# EAGLE board BLDC_schematic_v14 (EAGLE 9.6.2)
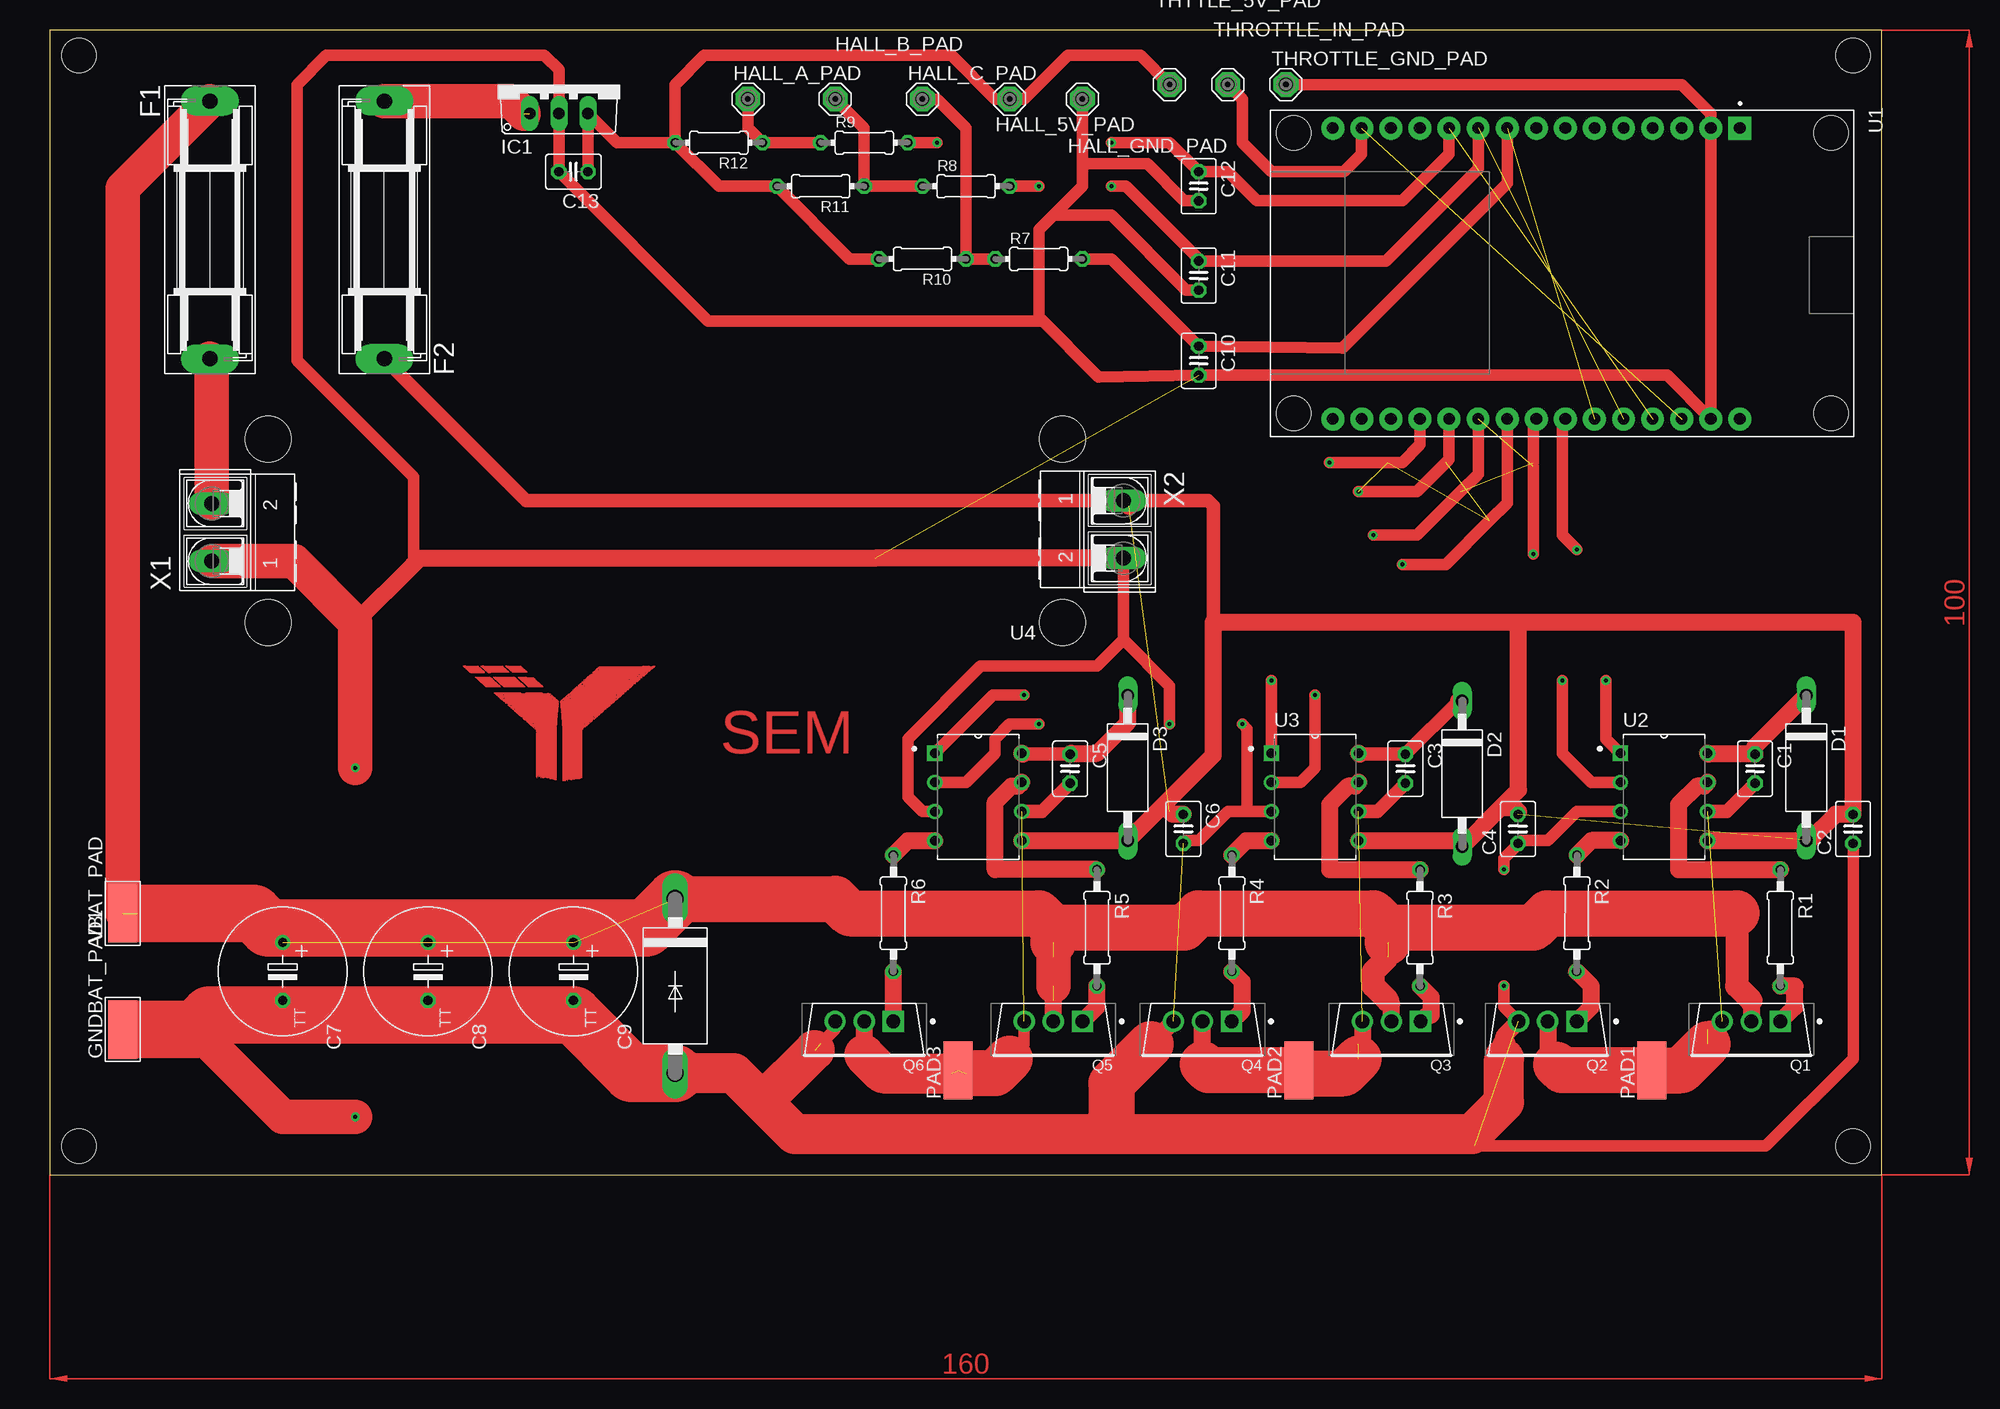
[diagram p0: board, top side]
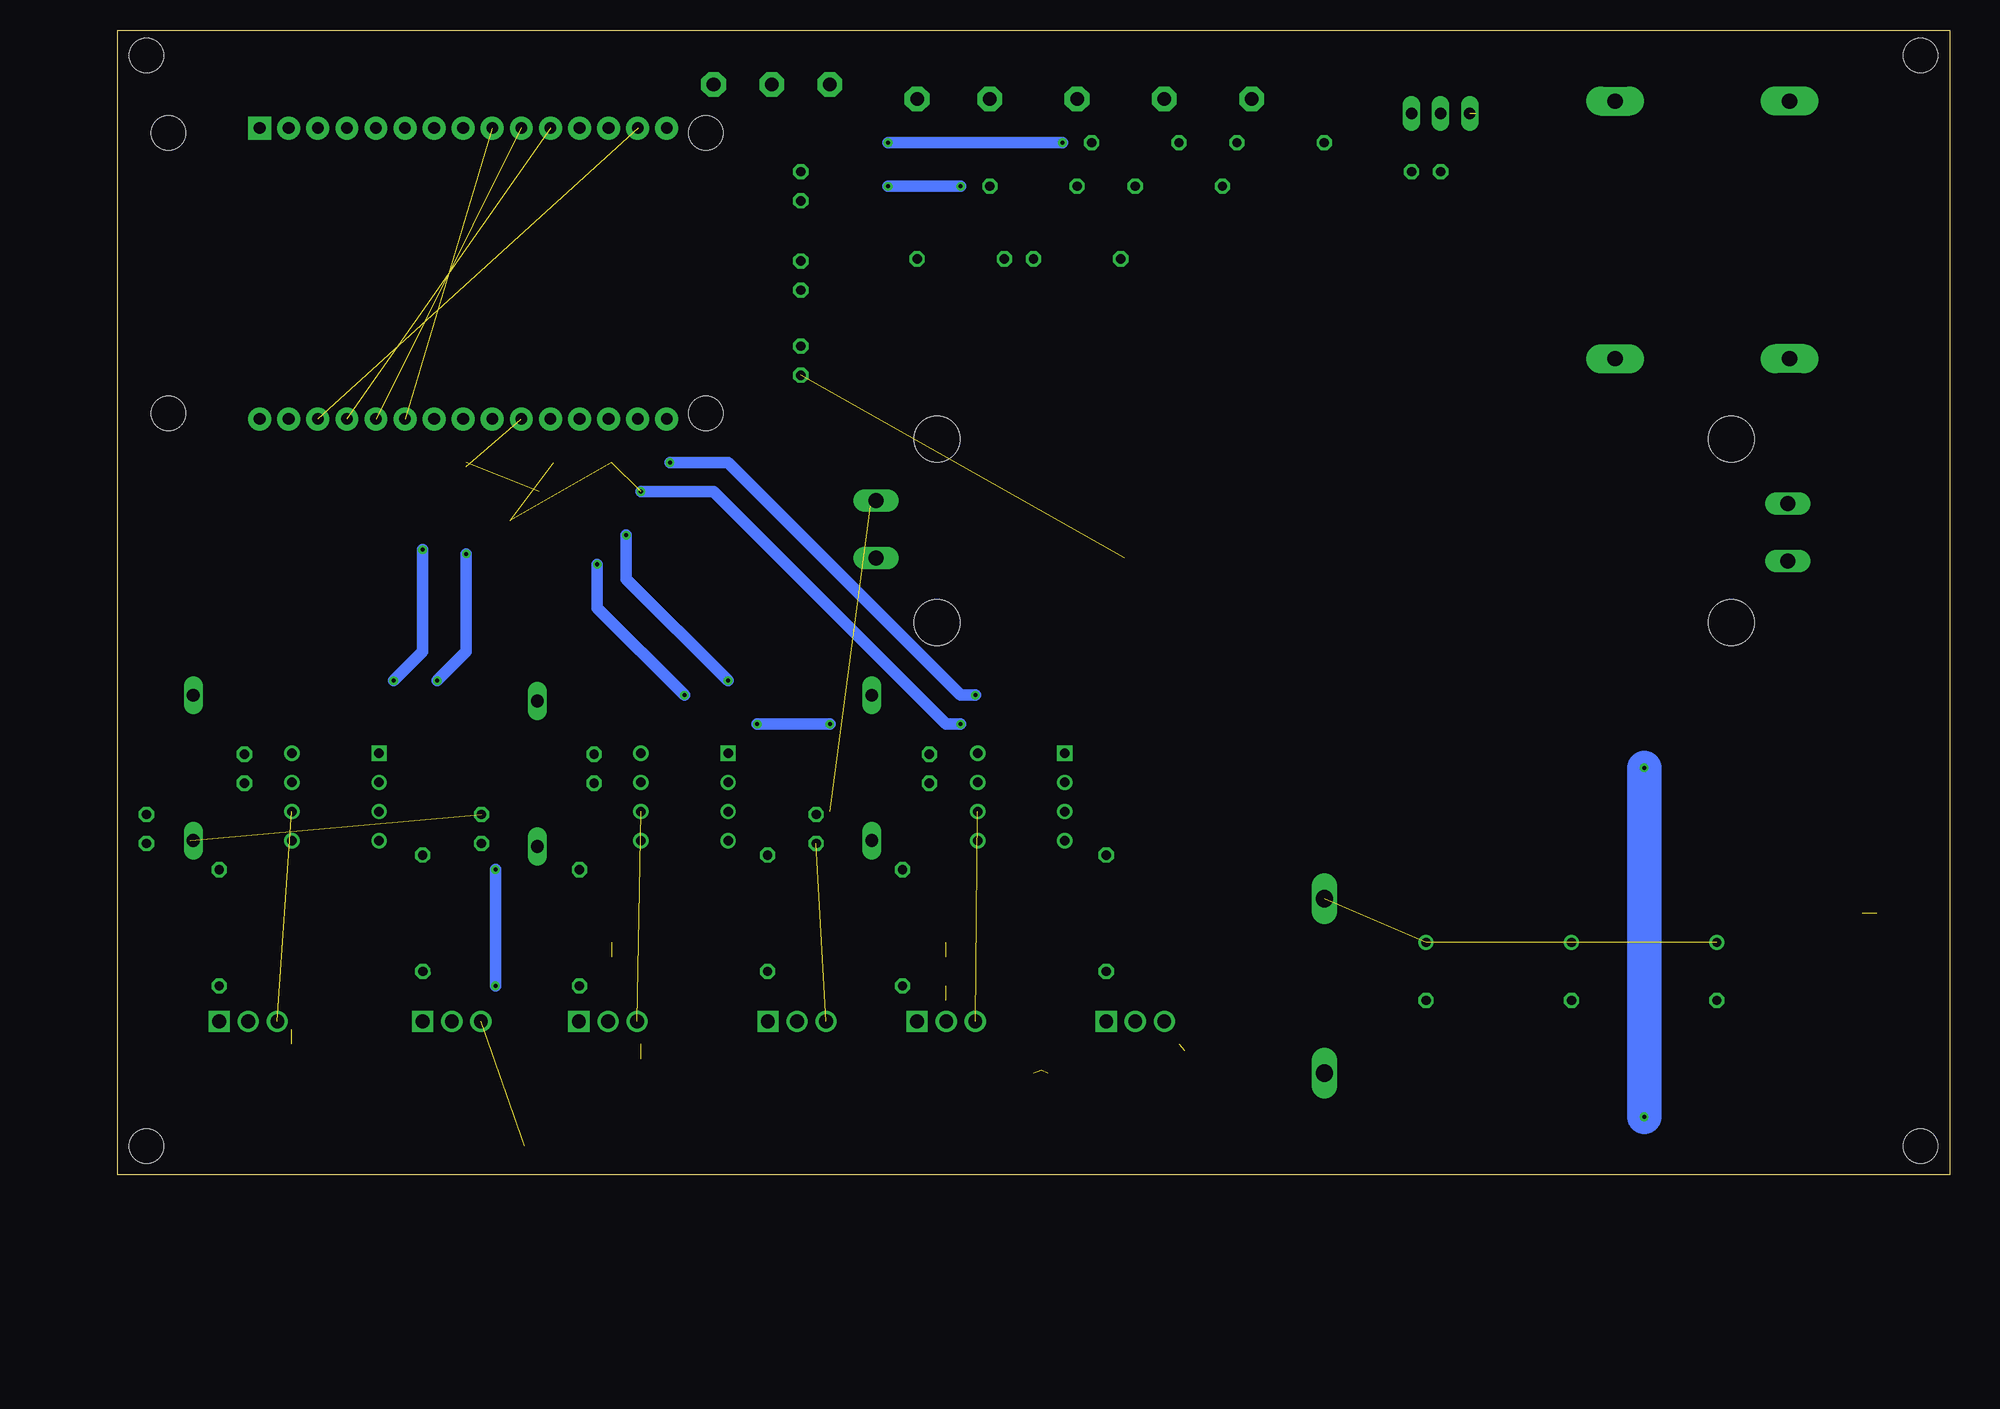
[diagram p1: board, bottom side, seen from below]

Size 160 x 100 mm. Coordinates in mm from the lower left corner, seen from the top.
Outline: 0,0 160,0 160,100 0,100 0,0
Copper layers (1*16): Top 0.035mm / dielectric 1.5mm / Bottom 0.035mm
Design rules "BLDC_schematic_v14": minimum track width 0.8mm, minimum drill 0.35mm, track to track 0.8mm, track to pad 0.8mm, pad to pad 0.205mm, via to via 0.205mm, smd to smd 6mil, copper to edge 40mil, drill to drill 6mil, minimum pad ring 10mil, minimum via ring 8mil, stop-mask expansion 4mil, vias tented up to drill 0mil, thermal gap 10mil
Net classes: 0 default: clearance 0.205 mm
Holes 3 mm at 2.54,2.54 2.54,97.79 157.48,2.54 157.48,97.79
Holes 4 mm at 19.05,48.26 19.05,64.26 88.45,48.26 88.45,64.26

## Footprints (pad centres in the part's own frame; a part is rotated, then mirrored left to right if it is on the bottom)
C025-030X050 = drill 0.813 octagon: 1 -1.27,0; 2 1.27,0
TT5D11 = drill 0.813: + -2.54,0 | drill 0.813 octagon: - 2.54,0
DO15-12 = drill 1.118 long: A 6.35,0; C -6.35,0
DO201-15 = drill 1.499 long: A 7.62,0; C -7.62,0
SH22,5 = drill 1.321 pad 2.54 long: 1 -11.252,0; 2 11.252,0
5-2,5 = smd 2.54 x 5.08: 1 0,0
MCS08 = drill 1.194 pad 2.159 octagon: MP 0,0
TO220V = drill 1.016 long: 1 -2.54,-2.54; 2 0,-2.54; 3 2.54,-2.54
SMD2,54-5,08 = smd 2.54 x 5.08: 1 0,0
INFINEON_IRFB3077PBF_0 = drill 1.2 pad 1.85 square: 1 -0.705,2.54 | drill 1.2 pad 1.85: 2 -0.705,0; 3 -0.705,-2.54
0207/10 = drill 0.813 octagon: 1 -5.08,0; 2 5.08,0
0204/7 = drill 0.813 octagon: 1 -3.81,0; 2 3.81,0
MODULE_ESP32_DEVKIT_V1 = drill 1.02 pad 2 square: 1 -12.7,15.515 | drill 1.02 pad 2: 2 -12.7,12.975; 3 -12.7,10.435; 4 -12.7,7.895; 5 -12.7,5.355; 6 -12.7,2.815; 7 -12.7,0.275; 8 -12.7,-2.265; 9 -12.7,-4.805; 10 -12.7,-7.345; 11 -12.7,-9.885; 12 -12.7,-12.425; 13 -12.7,-14.965; 14 -12.7,-17.505; 15 -12.7,-20.045; 16 12.7,-20.045; 17 12.7,-17.505; 18 12.7,-14.965; 19 12.7,-12.425; 20 12.7,-9.885; 21 12.7,-7.345; 22 12.7,-4.805; 23 12.7,-2.265; 24 12.7,0.275; 25 12.7,2.815; 26 12.7,5.355; 27 12.7,7.895; 28 12.7,10.435; 29 12.7,12.975; 30 12.7,15.515 | hole 3: -12.28,-23.475; 12.23,-23.475; 12.23,23.475; -12.28,23.475
DIP762W45P254L1092H533Q8 = drill 0.83 square: 1 -3.81,3.81 | drill 0.83: 2 -3.81,1.27; 3 -3.81,-1.27; 4 -3.81,-3.81; 5 3.81,-3.81; 6 3.81,-1.27; 7 3.81,1.27; 8 3.81,3.81
AK500/2-H = drill 1.321 long: 1 -2.515,0; 2 2.515,0

## Placement (x,y rotation side)
C1  [C025-030X050]  148.92,35.48 270 top
C2  [C025-030X050]  157.48,30.23 90 top
C3  [C025-030X050]  118.39,35.48 270 top
C4  [C025-030X050]  128.22,30.23 90 top
C5  [C025-030X050]  89.1,35.48 270 top
C6  [C025-030X050]  98.98,30.23 270 top
C7  [TT5D11]  20.32,17.78 270 top
C8  [TT5D11]  33.02,17.78 270 top
C9  [TT5D11]  45.72,17.78 270 top
C10  [C025-030X050]  100.33,71.12 270 top
C11  [C025-030X050]  100.33,78.56 270 top
C12  [C025-030X050]  100.33,86.36 270 top
C13  [C025-030X050]  45.72,87.63 180 top
D1  1N5060GP  [DO15-12]  153.39,35.56 270 top
D2  1N5060GP  [DO15-12]  123.34,35.05 270 top
D3  1N5060GP  [DO15-12]  94.13,35.56 270 top
D4  1N5400  [DO201-15]  54.61,16.51 270 top
F1  [SH22,5]  13.97,82.55 270 top
F2  [SH22,5]  29.21,82.55 90 top
GNDBAT_PAD1  WIREPADSMD5-2,5  [5-2,5]  6.35,12.7 0 top
HALL_5V_PAD  MCS08  [MCS08]  83.82,93.98 0 top
HALL_A_PAD  MCS08  [MCS08]  60.96,93.98 0 top
HALL_B_PAD  MCS08  [MCS08]  68.58,93.98 0 top
HALL_C_PAD  MCS08  [MCS08]  76.2,93.98 0 top
HALL_GND_PAD  MCS08  [MCS08]  90.17,93.98 0 top
IC1  788TV  [TO220V]  44.45,95.25 0 top
PAD1  [SMD2,54-5,08]  139.9,9.14 0 top
PAD2  [SMD2,54-5,08]  109.07,9.14 0 top
PAD3  [SMD2,54-5,08]  79.3,9.14 0 top
Q1  INFINEON_IRFB3077PBFINFINEON_IRFB3077PBF_0_0  [INFINEON_IRFB3077PBF_0]  148.59,12.7 270 top
Q2  INFINEON_IRFB3077PBFINFINEON_IRFB3077PBF_0_0  [INFINEON_IRFB3077PBF_0]  130.81,12.7 270 top
Q3  INFINEON_IRFB3077PBFINFINEON_IRFB3077PBF_0_0  [INFINEON_IRFB3077PBF_0]  117.17,12.7 270 top
Q4  INFINEON_IRFB3077PBFINFINEON_IRFB3077PBF_0_0  [INFINEON_IRFB3077PBF_0]  100.66,12.7 270 top
Q5  INFINEON_IRFB3077PBFINFINEON_IRFB3077PBF_0_0  [INFINEON_IRFB3077PBF_0]  87.63,12.7 270 top
Q6  INFINEON_IRFB3077PBFINFINEON_IRFB3077PBF_0_0  [INFINEON_IRFB3077PBF_0]  71.12,12.7 270 top
R1  100  [0207/10]  151.13,21.59 270 top
R2  100  [0207/10]  133.35,22.86 269.9 top
R3  100  [0207/10]  119.66,21.59 270 top
R4  100  [0207/10]  103.23,22.86 270 top
R5  100  [0207/10]  91.44,21.59 270 top
R6  100  [0207/10]  73.66,22.86 270 top
R7  [0204/7]  86.36,80.01 0 top
R8  [0204/7]  80.01,86.36 0 top
R9  [0204/7]  71.12,90.17 0 top
R10  [0204/7]  76.2,80.01 180 top
R11  [0204/7]  67.31,86.36 180 top
R12  [0204/7]  58.42,90.17 180 top
THROTTLE_GND_PAD  MCS08  [MCS08]  107.95,95.25 0 top
THROTTLE_IN_PAD  MCS08  [MCS08]  102.87,95.25 0 top
THTTLE_5V_PAD  MCS08  [MCS08]  97.79,95.25 0 top
U1  ESP32-DEVKIT-V1  [MODULE_ESP32_DEVKIT_V1]  132.08,78.74 270 top
U2  IR2183  [DIP762W45P254L1092H533Q8]  140.97,33.02 0 top
U3  IR2183  [DIP762W45P254L1092H533Q8]  110.49,33.02 0 top
U4  IR2183  [DIP762W45P254L1092H533Q8]  81.08,33.02 0 top
VBAT_PAD  WIREPADSMD5-2,5  [5-2,5]  6.35,22.86 0 top
X1  [AK500/2-H]  14.12,56.13 90 top
X2  [AK500/2-H]  93.75,56.39 270 top

## Library data of the parts
C1-C13 = rcl; SPICEPREFIX: C
D1-D4 = diode
F1 F2 = fuse; MF: SCHURTER; MPN: 0031.8201; OC_FARNELL: 1162740; OC_NEWARK: 96F8317
GNDBAT_PAD1 PAD1-PAD3 VBAT_PAD = wirepad
HALL_5V_PAD HALL_A_PAD HALL_B_PAD HALL_C_PAD HALL_GND_PAD THROTTLE_GND_PAD THROTTLE_IN_PAD THTTLE_5V_PAD = solpad
IC1 = linear
Q1-Q6 = Infineon - IRFB3077PBF; AUTOMOTIVE: No; CENTROID_NOT_SPECIFIED: No; CONTINUOUS_DRAIN_CURRENT: 210A; DATASHEET: https://www.infineon.com/dgdl/Infineon-IRFB3077-DataSheet-v01_01-EN.pdf?fileId=5546d462533600a4015356153f0d1def; DEPLETION_MODE: False; DEVICE_CLASS_L1: Discrete Semiconductors; DEVICE_CLASS_L2: Transistors; DEVICE_CLASS_L3: MOSFETs; DIGIKEY_DESCRIPTION: MOSFET N-CH 75V 120A TO220AB; DIGIKEY_PART_NUMBER: IRFB3077PBF-ND; DRAIN_TO_SOURCE_BREAKDOWN_VOLTAGE: 75V; DRAIN_TO_SOURCE_RESISTANCE: 2.8mΩ; DRAIN_TO_SOURCE_VOLTAGE: 75V; FOOTPRINT_URL: https://www.infineon.com/cms/en/product/packages/PG-TO220/PG-TO220-3-904/; FOOTPRINT_VARIANT_NAME_0: Recommended_Land_Pattern; GATE_CHARGE_AT_VGS: 160nC @ 10V; GATE_TO_SOURCE_VOLTAGE: 20V; HEIGHT: 19.15mm; INPUT_CAPACITACE_AT_VDS: 9400pF @ 50V; LEAD_FREE: Yes; MAX_FORWARD_DIODE_VOLTAGE: 1.3V; MAX_JUNCTION_TEMP: +175°C; MF: Infineon; MFG_PACKAGE_IDENT: PG-TO220-3; MFG_PACKAGE_IDENT_COMPONENT_ID: 23a5373a371ebf18; MFG_PACKAGE_IDENT_DATE: 0; MFG_PACKAGE_IDENT_REV: 904; MOUSER_PART_NUMBER: 942-IRFB3077PBF; MPN: IRFB3077PBF; NUMBER_OF_CHANNELS: 1; NUMBER_OF_N_CHANNELS: 1; PACKAGE: TO-220AB; POWER_DISSIPATION: 370W; PREFIX: Q; PULSE_DRAIN_CURRENT: 850A; REVERSE_RECOVERY_CHARGE: 59nC; REVERSE_RECOVERY_TIME: 42ns; ROHS: Yes; RTHJA_MAX: 62°C/W; STANDOFF_HEIGHT: 3.56mm; TECHNOLOGY: NA; TEMPERATURE_RANGE_HIGH: +175°C; TEMPERATURE_RANGE_LOW: -55°C; THRESHOLD_VGS_MAX: 4V; THRESHOLD_VGS_MIN: 2V; TURN_OFF_DELAY_TIME: 69ns; TURN_ON_DELAY_TIME: 25ns; VERIFICATION_VERSION: 0.0.0.3
R1-R12 = rcl; SPICEPREFIX: R
U1 = ESP32-DEVKIT-V1; AVAILABILITY: Not in stock; DESCRIPTION: Dual core, Wi-Fi: 2.4 GHz up to 150 Mbits/s,BLE (Bluetooth Low Energy) and legacy Bluetooth, 32 bits, Up to 240 MHz; MF: Do it; MP: ESP32-DEVKIT-V1; PACKAGE: None; PRICE: None
U2-U4 = IR2183; AVAILABILITY: In Stock; DESCRIPTION: Half-Bridge Gate Driver IC Inverting, Non-Inverting 14-SOIC; MF: Infineon; MP: IR2183; PACKAGE: DIP-8 International Rectifier; PRICE: None; PURCHASE-URL: https://pricing.snapeda.com/search/part/IR2183/?ref=eda
X1 X2 = con-ptr500; OC_FARNELL: unknown; OC_NEWARK: unknown

## Nets
5V: C13.1 HALL_5V_PAD.MP IC1.3 R10.2 R11.2 R12.2 THTTLE_5V_PAD.MP
17V: C2.2 C4.2 C6.1 F2.1 X2.1
GND: C2.1 C4.1 C6.2 C7.- C8.- C9.- C10.2 C11.2 C12.2 D4.A GNDBAT_PAD1.1 HALL_GND_PAD.MP Q2.3 Q4.3 Q6.3 THROTTLE_GND_PAD.MP U1.2 U1.29 U2.3 U3.3 U4.3 X1.1 X2.2
HALL_A: C12.1 R9.2 U1.27
HALL_B: C11.1 R8.2 U1.26
HALL_C: C10.1 R7.2 U1.25
HIN_1: U1.24 U2.1
HIN_2: U1.23 U3.1
HIN_3: U1.22 U4.1
HO_1: R1.1 U2.7
HO_2: R3.1 U3.7
HO_3: R5.1 U4.7
LIN_1: U1.21 U2.2
LIN_2: U1.20 U3.2
LIN_3: U1.19 U4.2
LO_1: R2.1 U2.4
LO_2: R4.1 U3.4
LO_3: R6.1 U4.4
N$1: C3.1 D2.C U3.8
N$2: C5.1 D3.C U4.8
N$3: C1.1 D1.C U2.8
N$4: C13.2 IC1.2
N$5: F1.2 X1.2
N$6: Q3.1 R3.2
N$7: Q1.1 R1.2
N$8: Q2.1 R2.2
N$9: Q4.1 R4.2
N$10: D3.A U4.5
N$11: Q5.1 R5.2
N$12: Q6.1 R6.2
N$13: F2.2 IC1.1
N$14: HALL_A_PAD.MP R9.1 R12.1
N$15: HALL_B_PAD.MP R8.1 R11.1
N$16: HALL_C_PAD.MP R7.1 R10.1
N$18: D2.A U3.5
N$20: D1.A U2.5
PHASE_1: C1.2 PAD1.1 Q1.3 Q2.2 U2.6
PHASE_2: C3.2 PAD2.1 Q3.3 Q4.2 U3.6
PHASE_3: C5.2 PAD3.1 Q5.3 Q6.2 U4.6
RAW_VCC: C7.+ C8.+ C9.+ D4.C F1.1 Q1.2 Q3.2 Q5.2 VBAT_PAD.1
THROTTLE: THROTTLE_IN_PAD.MP U1.28
VCC_5V: U1.30

## Tracks (layer width: path | path; a pad name or v marks a point on that pad's centre or on a via)
5V
  Top 1: R12.2 49.53,90.17 IC1.3 C13.1 | R12.2 58.42,86.36 R11.2 69.85,80.01 R10.2 | R12.2 54.61,95.25 57.15,97.79 78.74,97.79 82.55,93.98 HALL_5V_PAD.MP 85.09,93.98 88.9,97.79 95.25,97.79 THTTLE_5V_PAD.MP
17V  (2 unrouted)
  Top 1.2: F2.1 41.6,58.9 X2.1 101.12,58.9 101.6,58.42 101.6,48.26
  Top 1.5: X2.1 94.23,58.42 | C6.1 98.04,31.5 97.79,31.75 | 153.67,29.21 155.96,31.5 C2.2 157.48,48.26 101.6,48.26
GND  (via drill 0.35)  (4 unrouted)
  Top 1: X2.2 93.75,46.76 | U4.3 76.2,31.75 74.93,33.02 74.93,38.1 81.28,44.45 91.44,44.45 93.75,46.76 | C6.2 99.24,29.21 100.33,29.21 102.87,31.75 104.55,31.75 | 104.55,31.75 U3.3 | 93.75,46.76 97.79,42.72 v97.79,39.37 | U2.3 133.35,31.75 130.81,29.21 128.47,29.21 C4.1 128.27,28.91 127,27.64 v127,26.67 | v104.14,39.37 104.55,38.96 104.55,31.75 | C2.1 157.48,10.16 149.86,2.54 124.46,2.54 | Q2.3 127,14.68 v127,16.51 | 44.45,92.71 44.45,96.52 43.18,97.79 24.13,97.79 21.59,95.25 21.59,71.12 31.75,60.96 31.75,53.34 | HALL_GND_PAD.MP 90.17,88.32 | 90.17,88.32 90.17,86.36 87.63,83.82 | 87.63,83.82 86.36,82.55 86.36,74.93 91.59,69.7 C10.2 141.25,69.85 U1.29 U1.2 145.06,92.71 142.51,95.25 THROTTLE_GND_PAD.MP | C12.2 99.06,85.09 95.83,88.32 90.17,88.32 | C11.2 99.24,77.29 92.71,83.82 87.63,83.82 | Q6.3 68.58,12.7 67.31,11.43
  Top 1.5: Q2.3 127,12.13 127,11.43 | Q4.3 96.14,11.43 95.25,11.43 | X2.2 72.06,53.87 32.28,53.87 31.75,53.34 26.67,48.26
  Top 2: 127,10.16 127,11.43 | GNDBAT_PAD1.1 7.62,13.97 13.97,13.97 | C7.- C8.- C9.- 52.07,8.89 D4.A
  Top 3: X1.1 21.31,53.62 26.67,48.26 v26.67,35.56 | v26.67,5.08 20.32,5.08 12.7,12.7
  Top 3.5: D4.A 59.74,8.89 62.26,6.38 | 127,10.16 127,6.35 124.21,3.56 65.08,3.56 62.26,6.38 | 62.26,6.38 66.78,10.9 66.8,10.9
  Top 4: 96.14,11.43 92.71,8 92.71,5.08
  Top 5: D4.A 50.8,8.89 45.72,13.97 13.97,13.97 12.7,12.7 7.62,12.7
  Bottom 1: v104.14,39.37 v97.79,39.37 | v127,16.51 v127,26.67
  Bottom 3: v26.67,35.56 v26.67,5.08
HALL_A  (via drill 0.35)  (1 unrouted)
  Top 1: v92.71,90.17 97.79,90.17 C12.1 102.87,87.63 105.41,85.09 118.11,85.09 122.2,89.18 122.2,91.44 | R9.2 v77.47,90.17
  Bottom 1: v77.47,90.17 v92.71,90.17
HALL_B  (via drill 0.35)  (1 unrouted)
  Top 1: R8.2 v86.36,86.36 | v92.71,86.36 93.98,86.36 100.45,79.89 C11.1 116.66,79.83 124.74,87.91 124.74,91.47
  Bottom 1: v86.36,86.36 v92.71,86.36
HALL_C  (1 unrouted)
  Top 1: R7.2 92.71,80.01 100.28,72.44 C10.1 112.88,72.24 127.28,86.64 127.28,91.44
HIN_1  (via drill 0.35)
  Top 1: U2.1 135.89,38.1 v135.89,43.18 | v133.35,54.61 132.08,55.88 132.08,65.77 U1.24
  Bottom 1: v135.89,43.18 133.35,45.72 v133.35,54.61
HIN_2  (via drill 0.35)  (1 unrouted)
  Top 1: U3.1 v106.68,43.18 | 123.19,59.69 119.38,55.88 v115.57,55.88 | U1.23 129.54,65.77 129.54,62.23
  Bottom 1: v106.68,43.18 115.57,52.07 v115.57,55.88
HIN_3  (via drill 0.35)  (1 unrouted)
  Top 1: U4.1 82.35,41.91 v85.09,41.91 | v111.76,62.23 116.84,62.23 | U1.22 127.28,58.7 125.73,57.15
  Bottom 1: v85.09,41.91 86.36,41.91 106.68,62.23 v111.76,62.23
HO_1
  Top 1.5: U2.7 144.46,33.97 143.86,33.97 142.24,32.35 142.24,26.67 R1.1
HO_2
  Top 1.5: U3.7 113.98,33.97 113.38,33.97 111.76,32.35 111.76,26.67 R3.1
HO_3
  Top 1.5: R5.1 82.55,26.67 82.55,32.55 83.97,33.97 84.57,33.97 U4.7
LIN_1  (via drill 0.35)  (1 unrouted)
  Top 1: U2.2 134.62,34.29 132.08,36.83 v132.08,43.18 | v129.54,54.25 129.54,61.87 | U1.21 124.73,61.23 123.19,59.69
  Bottom 1: v132.08,43.18 129.54,45.72 v129.54,54.25
LIN_2  (via drill 0.35)  (1 unrouted)
  Top 1: U3.2 109.22,34.29 110.49,35.56 v110.49,41.91 | v118.11,53.34 121.92,53.34 125.73,57.15 | U1.20 122.19,62.51 121.92,62.23
  Bottom 1: v110.49,41.91 118.11,49.53 v118.11,53.34
LIN_3  (via drill 0.35)  (1 unrouted)
  Top 1: U4.2 80.01,34.29 82.55,36.83 82.55,38.1 83.82,39.37 v86.36,39.37 | v114.3,59.69 119.38,59.69 121.92,62.23 | U1.19 119.66,63.77 118.11,62.23 116.84,62.23
  Bottom 1: v86.36,39.37 87.63,39.37 107.95,59.69 v114.3,59.69
LO_1
  Top 1.5: U2.4 134.62,29.21 R2.1
LO_2
  Top 1.5: R4.1 104.5,29.21 U3.4
LO_3
  Top 1.5: R6.1 74.93,29.21 U4.4
N$1
  Top 1.2: 114.38,36.75 C3.1 123.04,41.4
  Top 1.5: 114.38,36.75 U3.8 | 123.04,41.4 D2.C
N$2
  Top 1.2: C5.1 84.96,36.75
  Top 1.5: 84.96,36.75 U4.8 | C5.1 89.18,36.83 91.44,36.83 94.13,39.52 D3.C
N$3
  Top 1.5: D1.C 148.92,37.44 C1.1 144.86,36.75 U2.8
N$4
  Top 1: IC1.2 C13.2 57.48,74.6 86.61,74.6
N$5
  Top 3: F1.2 14.12,71.14 X1.2
N$6
  Top 1.5: Q3.1 120.28,13.97 120.65,13.97 120.65,15.52 R3.2
N$7
  Top 1.5: Q1.1 152.4,14.68 152.4,16.51 R1.2
N$8
  Top 1.5: Q2.1 134.62,14.68 134.62,16.51 R2.2
N$9
  Top 1.5: Q4.1 104.14,14.35 104.14,16.87 R4.2
N$10
  Top 1.5: U4.5 D3.A 99.14,34.21 101.6,36.68 101.6,48.26
N$11
  Top 1.5: Q5.1 91.44,14.68 R5.2
N$12
  Top 1.5: Q6.1 R6.2
N$13  (1 unrouted)
  Top 3: F2.2 40.3,93.8 41.39,92.71
N$14
  Top 1: R9.1 R12.1 60.96,91.44 HALL_A_PAD.MP
N$15
  Top 1: R8.1 R11.1 71.12,91.44 HALL_B_PAD.MP
N$16
  Top 1: R7.1 R10.1 80.01,91.44 77.47,93.98 HALL_C_PAD.MP
N$18
  Top 1.5: U3.5 122.83,29.21 D2.A 126.69,32.05 | 126.69,32.05 128.27,33.63 128.27,48.26 | 126.69,32.05 127.97,32.05 128.27,31.75
N$20
  Top 1.5: U2.5 D1.A
PHASE_1  (2 unrouted)
  Top 1.2: C1.2 146.46,31.75 U2.6
  Top 1.5: 131.56,9.64 130.81,10.39 Q2.2 | Q1.3 145.34,12.7 144.78,12.7
  Top 4: 144.78,11.43 142.49,9.14 PAD1.1 132.06,9.14 131.56,9.64
PHASE_2  (2 unrouted)
  Top 1.2: U3.6 115.93,31.75 C3.2
  Top 1.5: 100.66,9.7 Q4.2 | Q3.3 114.63,11.76 114.3,11.43
  Top 4: 114.3,10.16 113.03,8.89 109.32,8.89 PAD2.1 101.22,9.14 100.66,9.7
PHASE_3  (3 unrouted)
  Top 1: Q5.3 85.09,11.43 83.82,10.16
  Top 1.2: C5.2 86.64,31.75 U4.6
  Top 1.5: Q6.2 71.12,10.49
  Top 3.5: 71.12,10.49 72.72,8.89 78.74,8.89
  Top 4: 83.82,10.16 82.55,8.89 80.01,8.89
RAW_VCC  (7 unrouted)
  Top 1.5: Q3.2 117.17,14.91 116.84,15.24 | 148.59,15.24 Q1.2 | Q5.2 87.63,15.24
  Top 2: 116.84,15.24 115.57,16.51 115.57,17.78 116.84,19.05 | 147.32,22.86 147.32,16.51 148.59,15.24
  Top 3: 87.63,16.51 87.63,19.05 | VBAT_PAD.1 6.35,86.18 F1.1
  Top 4: D4.C 68.58,24.13 69.85,22.86 86.36,22.86 87.63,21.59 | 116.84,21.59 115.57,22.86 100.33,22.86 99.06,21.59 87.63,21.59 | 116.84,21.59 129.54,21.59 130.81,22.86 147.32,22.86 | 116.84,21.59 116.84,20.32 | 87.63,21.59 87.63,20.32
  Top 5: D4.C 52.07,21.59 19.05,21.59 17.78,22.86 7.62,22.86
THROTTLE  (1 unrouted)
  Top 1: THROTTLE_IN_PAD.MP 104.14,93.98 104.14,90.17 106.68,87.63 113.03,87.63 114.55,89.15 114.55,91.44
(copper drawn outside any net)
  shapes: Top area x1577

## Text on the board
Top: SEM
Bottom: C:/Users/fernando/Pictures/Escul/logonormal.bmp
200bmp: C:/Users/fernando/Downloads/Capture (1).bmp
204bmp: C:/Users/fernando/Downloads/Capture (1).bmp
207bmp: C:/Users/fernando/Downloads/Capture (1).bmp